# Altium PCB PCB2.PcbDoc (part 1 of 2)
Units mm, origin at the board's own origin, x right, y up, seen from the top; angles counter-clockwise.
Board outline 126 x 36 mm, 2 copper layers (Top Layer, Bottom Layer); 354 components, 48 nets, 750 pads, 362 vias.
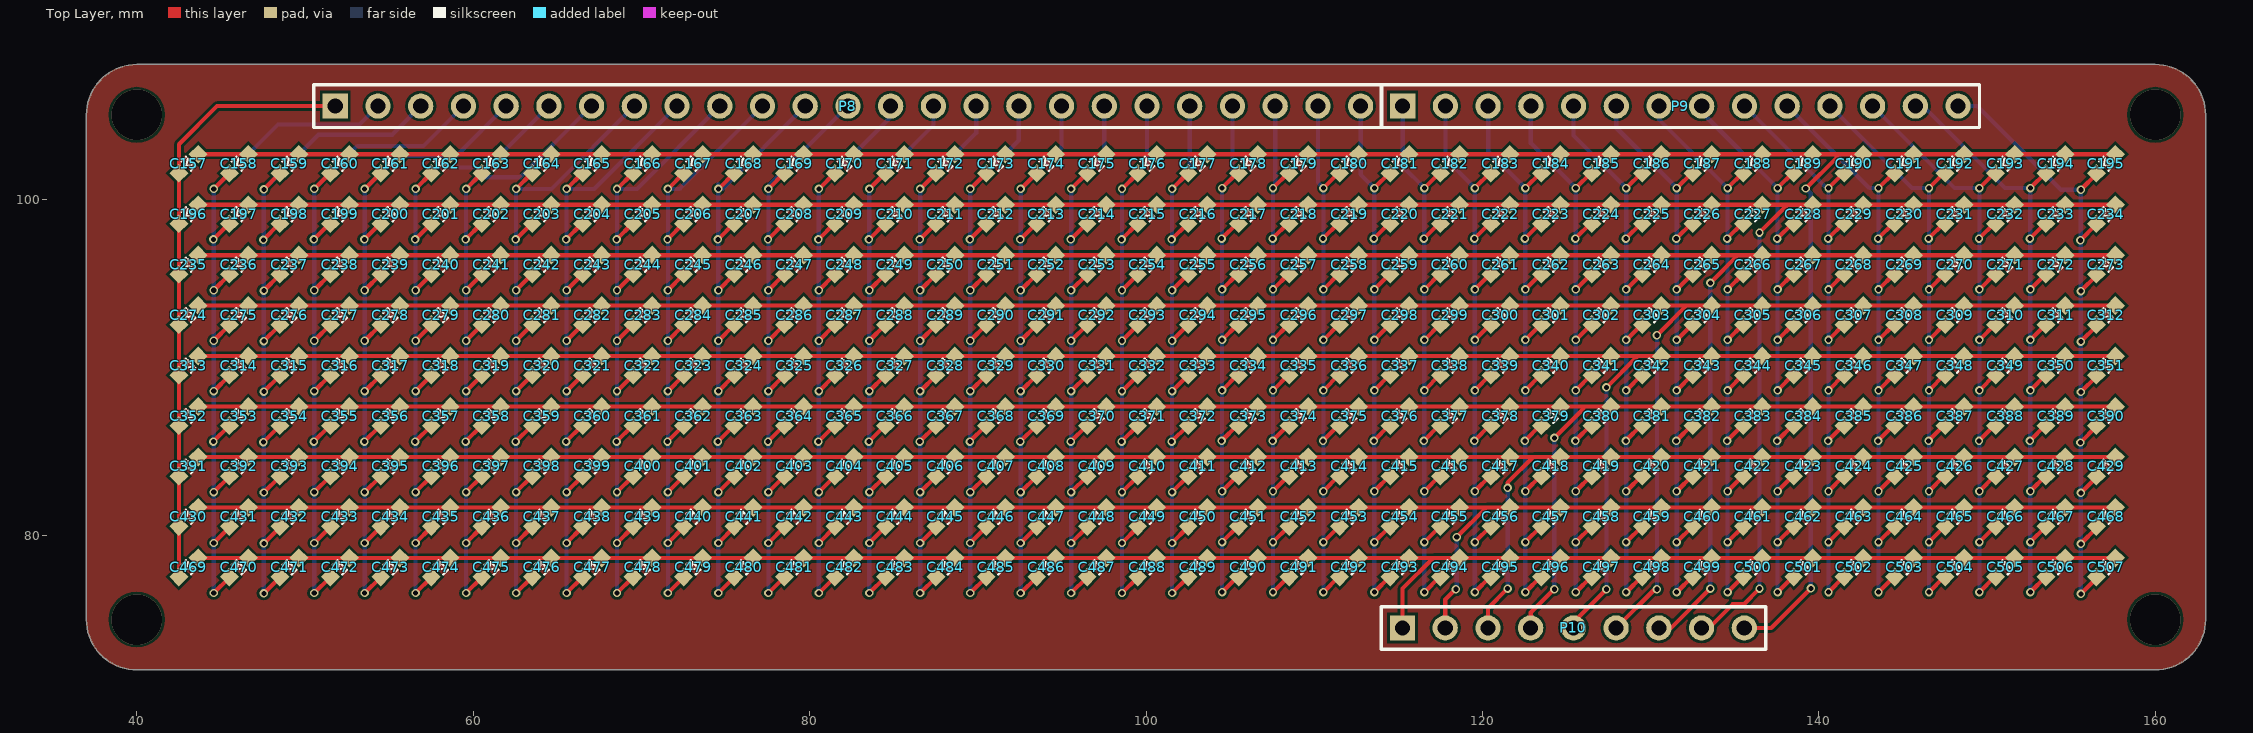
[diagram p0: Top Layer view]
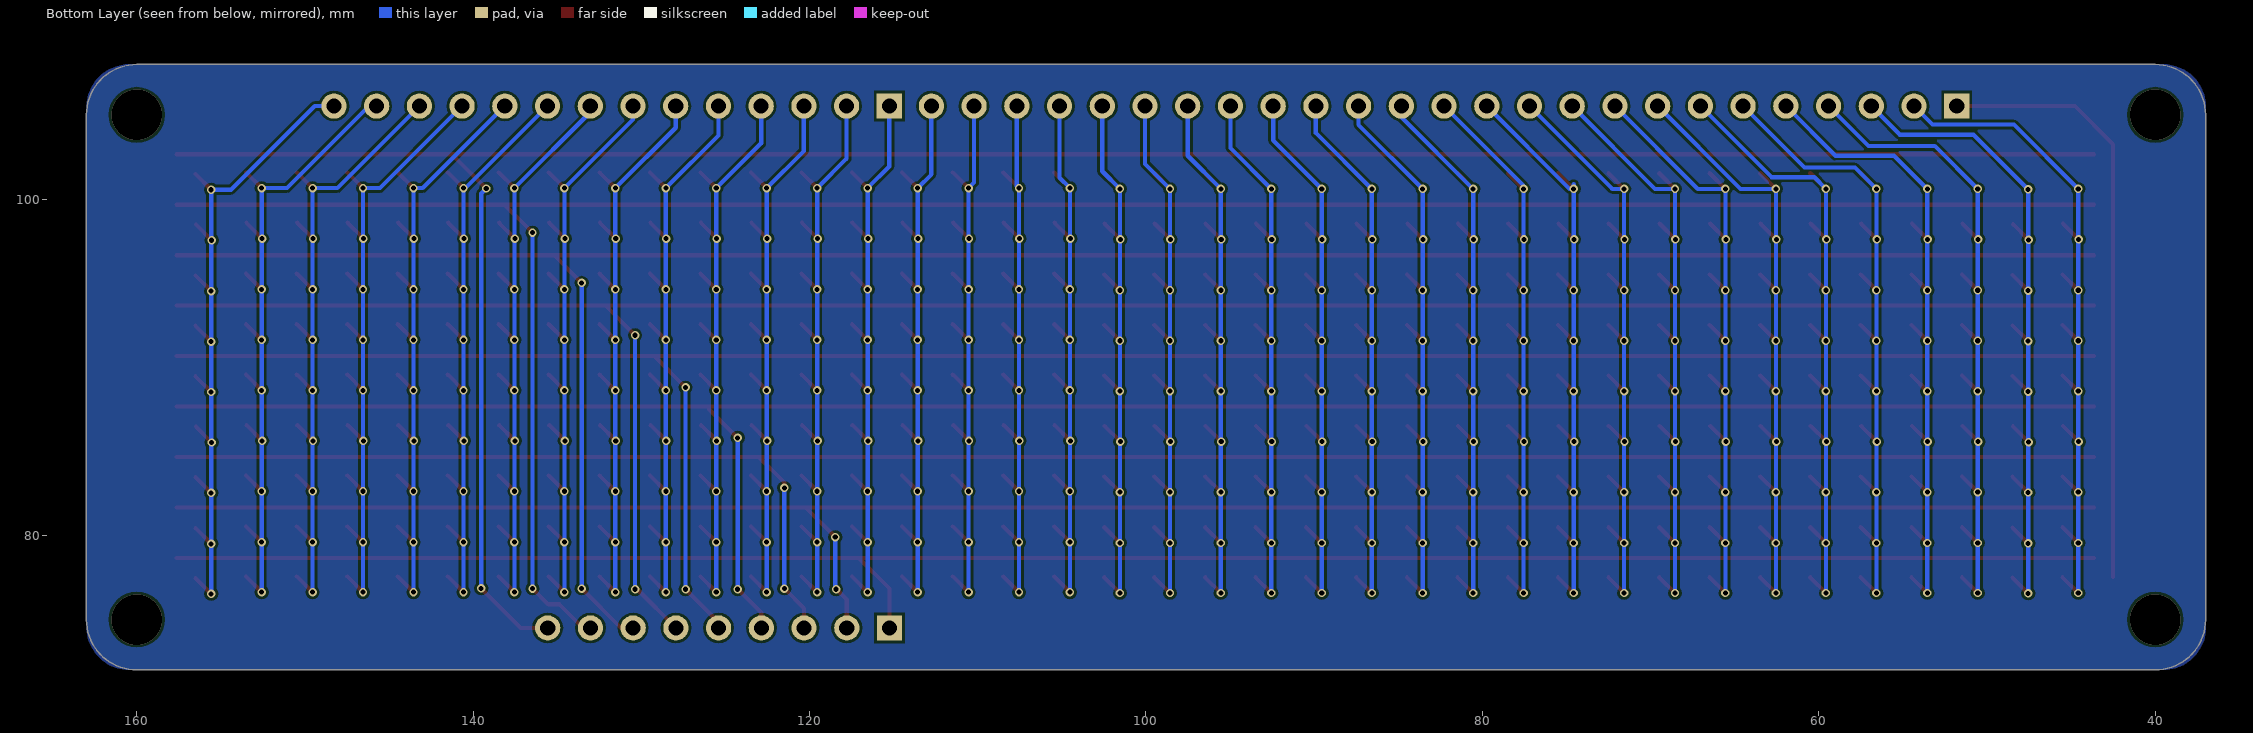
[diagram p1: Bottom Layer view, seen from below]

## Layer stack, top to bottom
Top Solder: solder mask 0.0102, Solder Resist, Dk 3.5
Top Layer: signal copper 0.0356
Dielectric 1: dielectric 0.32, FR-4, Dk 4.8
Bottom Layer: signal copper 0.0356
Bottom Solder: solder mask 0.0102, Solder Resist, Dk 3.5

## Board outline
40,72 cw(c40,75) 37,75 37,105 cw(c40,105) 40,108 160,108 cw(c160,105) 163,105 163,75 cw(c160,75) 160,72

## Design rules (kind name [scope] priority, off if disabled: settings)
Clearance [All] p1: gap=0.152 ignorepadtopadclearanceinfootprint=FALSE except(0.254: Arc-Arc Arc-Track Track-Track)
ComponentClearance [All] p1: gap=0 collisioncheckmode=3 verticalgap=0 showdistances=FALSE
PolygonConnect [All] p1: connectstyle=Relief reliefconductorwidth=0.254 reliefentries=4 polygonreliefangle="90 Angle" airgapwidth=0.254
RoutingCorners [All] p1: cornerstyle=Round minsetback=2.54 maxsetback=2.54
RoutingLayers RoutingLayers_1 [All] p1: top layer_v5=TRUE bottom layer_v5=TRUE
RoutingVias [All] p1: holewidth=0.3 width=0.5 viastyle="Through Hole" minholewidth=0.3 minwidth=0.5 maxholewidth=0.3 maxwidth=0.5
ShortCircuit [All] p1: allowed=TRUE
SolderMaskExpansion [All] p1: expansion=0.102
Width [All] p1: maxlimit=0.254 minlimit=0.254 preferedwidth=0.254
26 further rules are at their usual default settings.

## Components (designator, comment, footprint, x,y, rotation, side; value= is the part's Value field where it differs from the comment)
C157 "LED" "LED 0603(2)" 43.1,102.125 r225 top
C158 "LED" "LED 0603(2)" 46.1,102.125 r225 top
C159 "LED" "LED 0603(2)" 49.1,102.125 r225 top
C160 "LED" "LED 0603(2)" 52.1,102.125 r225 top
C161 "LED" "LED 0603(2)" 55.1,102.125 r225 top
C162 "LED" "LED 0603(2)" 58.1,102.125 r225 top
C163 "LED" "LED 0603(2)" 61.1,102.125 r225 top
C164 "LED" "LED 0603(2)" 64.1,102.125 r225 top
C165 "LED" "LED 0603(2)" 67.1,102.125 r225 top
C166 "LED" "LED 0603(2)" 70.1,102.125 r225 top
C167 "LED" "LED 0603(2)" 73.1,102.125 r225 top
C168 "LED" "LED 0603(2)" 76.1,102.125 r225 top
C169 "LED" "LED 0603(2)" 79.1,102.125 r225 top
C170 "LED" "LED 0603(2)" 82.1,102.125 r225 top
C171 "LED" "LED 0603(2)" 85.1,102.125 r225 top
C172 "LED" "LED 0603(2)" 88.1,102.125 r225 top
C173 "LED" "LED 0603(2)" 91.1,102.125 r225 top
C174 "LED" "LED 0603(2)" 94.1,102.125 r225 top
C175 "LED" "LED 0603(2)" 97.1,102.125 r225 top
C176 "LED" "LED 0603(2)" 100.1,102.125 r225 top
C177 "LED" "LED 0603(2)" 103.1,102.125 r225 top
C178 "LED" "LED 0603(2)" 106.1,102.125 r225 top
C179 "LED" "LED 0603(2)" 109.1,102.125 r225 top
C180 "LED" "LED 0603(2)" 112.1,102.125 r225 top
C181 "LED" "LED 0603(2)" 115.1,102.125 r225 top
C182 "LED" "LED 0603(2)" 118.1,102.125 r225 top
C183 "LED" "LED 0603(2)" 121.1,102.125 r225 top
C184 "LED" "LED 0603(2)" 124.1,102.125 r225 top
C185 "LED" "LED 0603(2)" 127.1,102.125 r225 top
C186 "LED" "LED 0603(2)" 130.1,102.125 r225 top
C187 "LED" "LED 0603(2)" 133.1,102.125 r225 top
C188 "LED" "LED 0603(2)" 136.1,102.125 r225 top
C189 "LED" "LED 0603(2)" 139.1,102.125 r225 top
C190 "LED" "LED 0603(2)" 142.1,102.125 r225 top
C191 "LED" "LED 0603(2)" 145.1,102.125 r225 top
C192 "LED" "LED 0603(2)" 148.1,102.125 r225 top
C193 "LED" "LED 0603(2)" 151.1,102.125 r225 top
C194 "LED" "LED 0603(2)" 154.1,102.125 r225 top
C195 "LED" "LED 0603(2)" 157.1,102.125 r225 top
C196 "LED" "LED 0603(2)" 43.1,99.125 r225 top
C197 "LED" "LED 0603(2)" 46.1,99.125 r225 top
C198 "LED" "LED 0603(2)" 49.1,99.125 r225 top
C199 "LED" "LED 0603(2)" 52.1,99.125 r225 top
C200 "LED" "LED 0603(2)" 55.1,99.125 r225 top
C201 "LED" "LED 0603(2)" 58.1,99.125 r225 top
C202 "LED" "LED 0603(2)" 61.1,99.125 r225 top
C203 "LED" "LED 0603(2)" 64.1,99.125 r225 top
C204 "LED" "LED 0603(2)" 67.1,99.125 r225 top
C205 "LED" "LED 0603(2)" 70.1,99.125 r225 top
C206 "LED" "LED 0603(2)" 73.1,99.125 r225 top
C207 "LED" "LED 0603(2)" 76.1,99.125 r225 top
C208 "LED" "LED 0603(2)" 79.1,99.125 r225 top
C209 "LED" "LED 0603(2)" 82.1,99.125 r225 top
C210 "LED" "LED 0603(2)" 85.1,99.125 r225 top
C211 "LED" "LED 0603(2)" 88.1,99.125 r225 top
C212 "LED" "LED 0603(2)" 91.1,99.125 r225 top
C213 "LED" "LED 0603(2)" 94.1,99.125 r225 top
C214 "LED" "LED 0603(2)" 97.1,99.125 r225 top
C215 "LED" "LED 0603(2)" 100.1,99.125 r225 top
C216 "LED" "LED 0603(2)" 103.1,99.125 r225 top
C217 "LED" "LED 0603(2)" 106.1,99.125 r225 top
C218 "LED" "LED 0603(2)" 109.1,99.125 r225 top
C219 "LED" "LED 0603(2)" 112.1,99.125 r225 top
C220 "LED" "LED 0603(2)" 115.1,99.125 r225 top
C221 "LED" "LED 0603(2)" 118.1,99.125 r225 top
C222 "LED" "LED 0603(2)" 121.1,99.125 r225 top
C223 "LED" "LED 0603(2)" 124.1,99.125 r225 top
C224 "LED" "LED 0603(2)" 127.1,99.125 r225 top
C225 "LED" "LED 0603(2)" 130.1,99.125 r225 top
C226 "LED" "LED 0603(2)" 133.1,99.125 r225 top
C227 "LED" "LED 0603(2)" 136.1,99.125 r225 top
C228 "LED" "LED 0603(2)" 139.1,99.125 r225 top
C229 "LED" "LED 0603(2)" 142.1,99.125 r225 top
C230 "LED" "LED 0603(2)" 145.1,99.125 r225 top
C231 "LED" "LED 0603(2)" 148.1,99.125 r225 top
C232 "LED" "LED 0603(2)" 151.1,99.125 r225 top
C233 "LED" "LED 0603(2)" 154.1,99.125 r225 top
C234 "LED" "LED 0603(2)" 157.1,99.125 r225 top
C235 "LED" "LED 0603(2)" 43.1,96.125 r225 top
C236 "LED" "LED 0603(2)" 46.1,96.125 r225 top
C237 "LED" "LED 0603(2)" 49.1,96.125 r225 top
C238 "LED" "LED 0603(2)" 52.1,96.125 r225 top
C239 "LED" "LED 0603(2)" 55.1,96.125 r225 top
C240 "LED" "LED 0603(2)" 58.1,96.125 r225 top
C241 "LED" "LED 0603(2)" 61.1,96.125 r225 top
C242 "LED" "LED 0603(2)" 64.1,96.125 r225 top
C243 "LED" "LED 0603(2)" 67.1,96.125 r225 top
C244 "LED" "LED 0603(2)" 70.1,96.125 r225 top
C245 "LED" "LED 0603(2)" 73.1,96.125 r225 top
C246 "LED" "LED 0603(2)" 76.1,96.125 r225 top
C247 "LED" "LED 0603(2)" 79.1,96.125 r225 top
C248 "LED" "LED 0603(2)" 82.1,96.125 r225 top
C249 "LED" "LED 0603(2)" 85.1,96.125 r225 top
C250 "LED" "LED 0603(2)" 88.1,96.125 r225 top
C251 "LED" "LED 0603(2)" 91.1,96.125 r225 top
C252 "LED" "LED 0603(2)" 94.1,96.125 r225 top
C253 "LED" "LED 0603(2)" 97.1,96.125 r225 top
C254 "LED" "LED 0603(2)" 100.1,96.125 r225 top
C255 "LED" "LED 0603(2)" 103.1,96.125 r225 top
C256 "LED" "LED 0603(2)" 106.1,96.125 r225 top
C257 "LED" "LED 0603(2)" 109.1,96.125 r225 top
C258 "LED" "LED 0603(2)" 112.1,96.125 r225 top
C259 "LED" "LED 0603(2)" 115.1,96.125 r225 top
C260 "LED" "LED 0603(2)" 118.1,96.125 r225 top
C261 "LED" "LED 0603(2)" 121.1,96.125 r225 top
C262 "LED" "LED 0603(2)" 124.1,96.125 r225 top
C263 "LED" "LED 0603(2)" 127.1,96.125 r225 top
C264 "LED" "LED 0603(2)" 130.1,96.125 r225 top
C265 "LED" "LED 0603(2)" 133.1,96.125 r225 top
C266 "LED" "LED 0603(2)" 136.1,96.125 r225 top
C267 "LED" "LED 0603(2)" 139.1,96.125 r225 top
C268 "LED" "LED 0603(2)" 142.1,96.125 r225 top
C269 "LED" "LED 0603(2)" 145.1,96.125 r225 top
C270 "LED" "LED 0603(2)" 148.1,96.125 r225 top
C271 "LED" "LED 0603(2)" 151.1,96.125 r225 top
C272 "LED" "LED 0603(2)" 154.1,96.125 r225 top
C273 "LED" "LED 0603(2)" 157.1,96.125 r225 top
C274 "LED" "LED 0603(2)" 43.1,93.125 r225 top
C275 "LED" "LED 0603(2)" 46.1,93.125 r225 top
C276 "LED" "LED 0603(2)" 49.1,93.125 r225 top
C277 "LED" "LED 0603(2)" 52.1,93.125 r225 top
C278 "LED" "LED 0603(2)" 55.1,93.125 r225 top
C279 "LED" "LED 0603(2)" 58.1,93.125 r225 top
C280 "LED" "LED 0603(2)" 61.1,93.125 r225 top
C281 "LED" "LED 0603(2)" 64.1,93.125 r225 top
C282 "LED" "LED 0603(2)" 67.1,93.125 r225 top
C283 "LED" "LED 0603(2)" 70.1,93.125 r225 top
C284 "LED" "LED 0603(2)" 73.1,93.125 r225 top
C285 "LED" "LED 0603(2)" 76.1,93.125 r225 top
C286 "LED" "LED 0603(2)" 79.1,93.125 r225 top
C287 "LED" "LED 0603(2)" 82.1,93.125 r225 top
C288 "LED" "LED 0603(2)" 85.1,93.125 r225 top
C289 "LED" "LED 0603(2)" 88.1,93.125 r225 top
C290 "LED" "LED 0603(2)" 91.1,93.125 r225 top
C291 "LED" "LED 0603(2)" 94.1,93.125 r225 top
C292 "LED" "LED 0603(2)" 97.1,93.125 r225 top
C293 "LED" "LED 0603(2)" 100.1,93.125 r225 top
C294 "LED" "LED 0603(2)" 103.1,93.125 r225 top
C295 "LED" "LED 0603(2)" 106.1,93.125 r225 top
C296 "LED" "LED 0603(2)" 109.1,93.125 r225 top
C297 "LED" "LED 0603(2)" 112.1,93.125 r225 top
C298 "LED" "LED 0603(2)" 115.1,93.125 r225 top
C299 "LED" "LED 0603(2)" 118.1,93.125 r225 top
C300 "LED" "LED 0603(2)" 121.1,93.125 r225 top
C301 "LED" "LED 0603(2)" 124.1,93.125 r225 top
C302 "LED" "LED 0603(2)" 127.1,93.125 r225 top
C303 "LED" "LED 0603(2)" 130.1,93.125 r225 top
C304 "LED" "LED 0603(2)" 133.1,93.125 r225 top
C305 "LED" "LED 0603(2)" 136.1,93.125 r225 top
C306 "LED" "LED 0603(2)" 139.1,93.125 r225 top
C307 "LED" "LED 0603(2)" 142.1,93.125 r225 top
C308 "LED" "LED 0603(2)" 145.1,93.125 r225 top
C309 "LED" "LED 0603(2)" 148.1,93.125 r225 top
C310 "LED" "LED 0603(2)" 151.1,93.125 r225 top
C311 "LED" "LED 0603(2)" 154.1,93.125 r225 top
C312 "LED" "LED 0603(2)" 157.1,93.125 r225 top
C313 "LED" "LED 0603(2)" 43.1,90.125 r225 top
C314 "LED" "LED 0603(2)" 46.1,90.125 r225 top
C315 "LED" "LED 0603(2)" 49.1,90.125 r225 top
C316 "LED" "LED 0603(2)" 52.1,90.125 r225 top
C317 "LED" "LED 0603(2)" 55.1,90.125 r225 top
C318 "LED" "LED 0603(2)" 58.1,90.125 r225 top
C319 "LED" "LED 0603(2)" 61.1,90.125 r225 top
C320 "LED" "LED 0603(2)" 64.1,90.125 r225 top
C321 "LED" "LED 0603(2)" 67.1,90.125 r225 top
C322 "LED" "LED 0603(2)" 70.1,90.125 r225 top
C323 "LED" "LED 0603(2)" 73.1,90.125 r225 top
C324 "LED" "LED 0603(2)" 76.1,90.125 r225 top
C325 "LED" "LED 0603(2)" 79.1,90.125 r225 top
C326 "LED" "LED 0603(2)" 82.1,90.125 r225 top
C327 "LED" "LED 0603(2)" 85.1,90.125 r225 top
C328 "LED" "LED 0603(2)" 88.1,90.125 r225 top
C329 "LED" "LED 0603(2)" 91.1,90.125 r225 top
C330 "LED" "LED 0603(2)" 94.1,90.125 r225 top
C331 "LED" "LED 0603(2)" 97.1,90.125 r225 top
C332 "LED" "LED 0603(2)" 100.1,90.125 r225 top
C333 "LED" "LED 0603(2)" 103.1,90.125 r225 top
C334 "LED" "LED 0603(2)" 106.1,90.125 r225 top
C335 "LED" "LED 0603(2)" 109.1,90.125 r225 top
C336 "LED" "LED 0603(2)" 112.1,90.125 r225 top
C337 "LED" "LED 0603(2)" 115.1,90.125 r225 top
C338 "LED" "LED 0603(2)" 118.1,90.125 r225 top
C339 "LED" "LED 0603(2)" 121.1,90.125 r225 top
C340 "LED" "LED 0603(2)" 124.1,90.125 r225 top
C341 "LED" "LED 0603(2)" 127.1,90.125 r225 top
C342 "LED" "LED 0603(2)" 130.1,90.125 r225 top
C343 "LED" "LED 0603(2)" 133.1,90.125 r225 top
C344 "LED" "LED 0603(2)" 136.1,90.125 r225 top
C345 "LED" "LED 0603(2)" 139.1,90.125 r225 top
C346 "LED" "LED 0603(2)" 142.1,90.125 r225 top
C347 "LED" "LED 0603(2)" 145.1,90.125 r225 top
C348 "LED" "LED 0603(2)" 148.1,90.125 r225 top
C349 "LED" "LED 0603(2)" 151.1,90.125 r225 top
C350 "LED" "LED 0603(2)" 154.1,90.125 r225 top
C351 "LED" "LED 0603(2)" 157.1,90.125 r225 top
C352 "LED" "LED 0603(2)" 43.1,87.125 r225 top
C353 "LED" "LED 0603(2)" 46.1,87.125 r225 top
C354 "LED" "LED 0603(2)" 49.1,87.125 r225 top
C355 "LED" "LED 0603(2)" 52.1,87.125 r225 top
C356 "LED" "LED 0603(2)" 55.1,87.125 r225 top
C357 "LED" "LED 0603(2)" 58.1,87.125 r225 top
C358 "LED" "LED 0603(2)" 61.1,87.125 r225 top
C359 "LED" "LED 0603(2)" 64.1,87.125 r225 top
C360 "LED" "LED 0603(2)" 67.1,87.125 r225 top
C361 "LED" "LED 0603(2)" 70.1,87.125 r225 top
C362 "LED" "LED 0603(2)" 73.1,87.125 r225 top
C363 "LED" "LED 0603(2)" 76.1,87.125 r225 top
C364 "LED" "LED 0603(2)" 79.1,87.125 r225 top
C365 "LED" "LED 0603(2)" 82.1,87.125 r225 top
C366 "LED" "LED 0603(2)" 85.1,87.125 r225 top
C367 "LED" "LED 0603(2)" 88.1,87.125 r225 top
C368 "LED" "LED 0603(2)" 91.1,87.125 r225 top
C369 "LED" "LED 0603(2)" 94.1,87.125 r225 top
C370 "LED" "LED 0603(2)" 97.1,87.125 r225 top
C371 "LED" "LED 0603(2)" 100.1,87.125 r225 top
C372 "LED" "LED 0603(2)" 103.1,87.125 r225 top
C373 "LED" "LED 0603(2)" 106.1,87.125 r225 top
C374 "LED" "LED 0603(2)" 109.1,87.125 r225 top
C375 "LED" "LED 0603(2)" 112.1,87.125 r225 top
C376 "LED" "LED 0603(2)" 115.1,87.125 r225 top
C377 "LED" "LED 0603(2)" 118.1,87.125 r225 top
C378 "LED" "LED 0603(2)" 121.1,87.125 r225 top
C379 "LED" "LED 0603(2)" 124.1,87.125 r225 top
C380 "LED" "LED 0603(2)" 127.1,87.125 r225 top
C381 "LED" "LED 0603(2)" 130.1,87.125 r225 top
C382 "LED" "LED 0603(2)" 133.1,87.125 r225 top
C383 "LED" "LED 0603(2)" 136.1,87.125 r225 top
C384 "LED" "LED 0603(2)" 139.1,87.125 r225 top
C385 "LED" "LED 0603(2)" 142.1,87.125 r225 top
C386 "LED" "LED 0603(2)" 145.1,87.125 r225 top
C387 "LED" "LED 0603(2)" 148.1,87.125 r225 top
C388 "LED" "LED 0603(2)" 151.1,87.125 r225 top
C389 "LED" "LED 0603(2)" 154.1,87.125 r225 top
C390 "LED" "LED 0603(2)" 157.1,87.125 r225 top
C391 "LED" "LED 0603(2)" 43.1,84.125 r225 top
C392 "LED" "LED 0603(2)" 46.1,84.125 r225 top
C393 "LED" "LED 0603(2)" 49.1,84.125 r225 top
C394 "LED" "LED 0603(2)" 52.1,84.125 r225 top
C395 "LED" "LED 0603(2)" 55.1,84.125 r225 top
C396 "LED" "LED 0603(2)" 58.1,84.125 r225 top
C397 "LED" "LED 0603(2)" 61.1,84.125 r225 top
C398 "LED" "LED 0603(2)" 64.1,84.125 r225 top
C399 "LED" "LED 0603(2)" 67.1,84.125 r225 top
C400 "LED" "LED 0603(2)" 70.1,84.125 r225 top
C401 "LED" "LED 0603(2)" 73.1,84.125 r225 top
C402 "LED" "LED 0603(2)" 76.1,84.125 r225 top
C403 "LED" "LED 0603(2)" 79.1,84.125 r225 top
C404 "LED" "LED 0603(2)" 82.1,84.125 r225 top
C405 "LED" "LED 0603(2)" 85.1,84.125 r225 top
C406 "LED" "LED 0603(2)" 88.1,84.125 r225 top
C407 "LED" "LED 0603(2)" 91.1,84.125 r225 top
C408 "LED" "LED 0603(2)" 94.1,84.125 r225 top
C409 "LED" "LED 0603(2)" 97.1,84.125 r225 top
C410 "LED" "LED 0603(2)" 100.1,84.125 r225 top
C411 "LED" "LED 0603(2)" 103.1,84.125 r225 top
C412 "LED" "LED 0603(2)" 106.1,84.125 r225 top
C413 "LED" "LED 0603(2)" 109.1,84.125 r225 top
C414 "LED" "LED 0603(2)" 112.1,84.125 r225 top
C415 "LED" "LED 0603(2)" 115.1,84.125 r225 top
C416 "LED" "LED 0603(2)" 118.1,84.125 r225 top
C417 "LED" "LED 0603(2)" 121.1,84.125 r225 top
C418 "LED" "LED 0603(2)" 124.1,84.125 r225 top
C419 "LED" "LED 0603(2)" 127.1,84.125 r225 top
C420 "LED" "LED 0603(2)" 130.1,84.125 r225 top
C421 "LED" "LED 0603(2)" 133.1,84.125 r225 top
C422 "LED" "LED 0603(2)" 136.1,84.125 r225 top
C423 "LED" "LED 0603(2)" 139.1,84.125 r225 top
C424 "LED" "LED 0603(2)" 142.1,84.125 r225 top
C425 "LED" "LED 0603(2)" 145.1,84.125 r225 top
C426 "LED" "LED 0603(2)" 148.1,84.125 r225 top
C427 "LED" "LED 0603(2)" 151.1,84.125 r225 top
C428 "LED" "LED 0603(2)" 154.1,84.125 r225 top
C429 "LED" "LED 0603(2)" 157.1,84.125 r225 top
C430 "LED" "LED 0603(2)" 43.1,81.125 r225 top
C431 "LED" "LED 0603(2)" 46.1,81.125 r225 top
C432 "LED" "LED 0603(2)" 49.1,81.125 r225 top
C433 "LED" "LED 0603(2)" 52.1,81.125 r225 top
C434 "LED" "LED 0603(2)" 55.1,81.125 r225 top
C435 "LED" "LED 0603(2)" 58.1,81.125 r225 top
C436 "LED" "LED 0603(2)" 61.1,81.125 r225 top
C437 "LED" "LED 0603(2)" 64.1,81.125 r225 top
C438 "LED" "LED 0603(2)" 67.1,81.125 r225 top
C439 "LED" "LED 0603(2)" 70.1,81.125 r225 top
C440 "LED" "LED 0603(2)" 73.1,81.125 r225 top
C441 "LED" "LED 0603(2)" 76.1,81.125 r225 top
C442 "LED" "LED 0603(2)" 79.1,81.125 r225 top
C443 "LED" "LED 0603(2)" 82.1,81.125 r225 top
C444 "LED" "LED 0603(2)" 85.1,81.125 r225 top
C445 "LED" "LED 0603(2)" 88.1,81.125 r225 top
C446 "LED" "LED 0603(2)" 91.1,81.125 r225 top
C447 "LED" "LED 0603(2)" 94.1,81.125 r225 top
C448 "LED" "LED 0603(2)" 97.1,81.125 r225 top
C449 "LED" "LED 0603(2)" 100.1,81.125 r225 top
C450 "LED" "LED 0603(2)" 103.1,81.125 r225 top
C451 "LED" "LED 0603(2)" 106.1,81.125 r225 top
C452 "LED" "LED 0603(2)" 109.1,81.125 r225 top
C453 "LED" "LED 0603(2)" 112.1,81.125 r225 top
C454 "LED" "LED 0603(2)" 115.1,81.125 r225 top
C455 "LED" "LED 0603(2)" 118.1,81.125 r225 top
C456 "LED" "LED 0603(2)" 121.1,81.125 r225 top
C457 "LED" "LED 0603(2)" 124.1,81.125 r225 top
C458 "LED" "LED 0603(2)" 127.1,81.125 r225 top
C459 "LED" "LED 0603(2)" 130.1,81.125 r225 top
C460 "LED" "LED 0603(2)" 133.1,81.125 r225 top
C461 "LED" "LED 0603(2)" 136.1,81.125 r225 top
C462 "LED" "LED 0603(2)" 139.1,81.125 r225 top
C463 "LED" "LED 0603(2)" 142.1,81.125 r225 top
C464 "LED" "LED 0603(2)" 145.1,81.125 r225 top
C465 "LED" "LED 0603(2)" 148.1,81.125 r225 top
C466 "LED" "LED 0603(2)" 151.1,81.125 r225 top
C467 "LED" "LED 0603(2)" 154.1,81.125 r225 top
C468 "LED" "LED 0603(2)" 157.1,81.125 r225 top
C469 "LED" "LED 0603(2)" 43.1,78.125 r225 top
C470 "LED" "LED 0603(2)" 46.1,78.125 r225 top
C471 "LED" "LED 0603(2)" 49.1,78.125 r225 top
C472 "LED" "LED 0603(2)" 52.1,78.125 r225 top
C473 "LED" "LED 0603(2)" 55.1,78.125 r225 top
C474 "LED" "LED 0603(2)" 58.1,78.125 r225 top
C475 "LED" "LED 0603(2)" 61.1,78.125 r225 top
C476 "LED" "LED 0603(2)" 64.1,78.125 r225 top
C477 "LED" "LED 0603(2)" 67.1,78.125 r225 top
C478 "LED" "LED 0603(2)" 70.1,78.125 r225 top
C479 "LED" "LED 0603(2)" 73.1,78.125 r225 top
C480 "LED" "LED 0603(2)" 76.1,78.125 r225 top
C481 "LED" "LED 0603(2)" 79.1,78.125 r225 top
C482 "LED" "LED 0603(2)" 82.1,78.125 r225 top
C483 "LED" "LED 0603(2)" 85.1,78.125 r225 top
C484 "LED" "LED 0603(2)" 88.1,78.125 r225 top
C485 "LED" "LED 0603(2)" 91.1,78.125 r225 top
C486 "LED" "LED 0603(2)" 94.1,78.125 r225 top
C487 "LED" "LED 0603(2)" 97.1,78.125 r225 top
C488 "LED" "LED 0603(2)" 100.1,78.125 r225 top
C489 "LED" "LED 0603(2)" 103.1,78.125 r225 top
C490 "LED" "LED 0603(2)" 106.1,78.125 r225 top
C491 "LED" "LED 0603(2)" 109.1,78.125 r225 top
C492 "LED" "LED 0603(2)" 112.1,78.125 r225 top
C493 "LED" "LED 0603(2)" 115.1,78.125 r225 top
C494 "LED" "LED 0603(2)" 118.1,78.125 r225 top
C495 "LED" "LED 0603(2)" 121.1,78.125 r225 top
C496 "LED" "LED 0603(2)" 124.1,78.125 r225 top
C497 "LED" "LED 0603(2)" 127.1,78.125 r225 top
C498 "LED" "LED 0603(2)" 130.1,78.125 r225 top
C499 "LED" "LED 0603(2)" 133.1,78.125 r225 top
C500 "LED" "LED 0603(2)" 136.1,78.125 r225 top
C501 "LED" "LED 0603(2)" 139.1,78.125 r225 top
C502 "LED" "LED 0603(2)" 142.1,78.125 r225 top
C503 "LED" "LED 0603(2)" 145.1,78.125 r225 top
C504 "LED" "LED 0603(2)" 148.1,78.125 r225 top
C505 "LED" "LED 0603(2)" 151.1,78.125 r225 top
C506 "LED" "LED 0603(2)" 154.1,78.125 r225 top
C507 "LED" "LED 0603(2)" 157.1,78.125 r225 top
P8 "Header 25" HDR1X25 51.8,105.525 r0 top locked
P9 "Header 14" HDR1X14 115.26,105.525 r0 top locked
P10 "Header 9" HDR1X9 115.25,74.5 r0 top

## Footprints (in the part's own frame and the unit in brackets; to place one, negate y for a bottom-side part, rotate by r counter-clockwise, add the part's x,y. Pads: shape width x height; smd on the part's side, far side on the other; paste and mask are expansions set on the pad)
HDR1X9 [mm] "Connector; Header; 9 Position"
  rect 1.5x1.5 hole 0.9: 1(0,0)
  round 1.5 hole 0.9: 2(2.54,0) 3(5.08,0) 4(7.62,0) 5(10.16,0) 6(12.7,0) 7(15.24,0) 8(17.78,0) 9(20.32,0)
  silkscreen extent -1.27,-1.27 21.59,1.27
HDR1X14 [mm] "Connector; Header; 14 Position"
  rect 1.5x1.5 hole 0.9: 1(0,0)
  round 1.5 hole 0.9: 2(2.54,0) 3(5.08,0) 4(7.62,0) 5(10.16,0) 6(12.7,0) 7(15.24,0) 8(17.78,0) 9(20.32,0) 10(22.86,0) 11(25.4,0) 12(27.94,0) 13(30.48,0) 14(33.02,0)
  silkscreen extent -1.27,-1.27 34.29,1.27
HDR1X25 [mm] "Connector; Header; 25 Position"
  rect 1.5x1.5 hole 0.9: 1(0,0)
  round 1.5 hole 0.9: 2(2.54,0) 3(5.08,0) 4(7.62,0) 5(10.16,0) 6(12.7,0) 7(15.24,0) 8(17.78,0) 9(20.32,0) 10(22.86,0) 11(25.4,0) 12(27.94,0) 13(30.48,0) 14(33.02,0) 15(35.56,0) 16(38.1,0) 17(40.64,0) 18(43.18,0) 19(45.72,0) 20(48.26,0) 21(50.8,0) 22(53.34,0) 23(55.88,0) 24(58.42,0) 25(60.96,0)
  silkscreen extent -1.27,-1.27 62.23,1.27
"LED 0603(2)" [mm]
  rect 0.8x0.8 smd: 1(-0.762,0) 2(0.838,0)
  silkscreen extent -0.16,-0.4 0.24,0.4

## Part data
P8: "Header, 25-Pin", LatestRevisionDate=17-Jul-2002, LatestRevisionNote="Re-released for DXP Platform.", Publisher="Altium Limited"
P9: "Header, 14-Pin", LatestRevisionDate=17-Jul-2002, LatestRevisionNote="Re-released for DXP Platform.", Publisher="Altium Limited"
P10: "Header, 9-Pin", LatestRevisionDate=17-Jul-2002, LatestRevisionNote="Re-released for DXP Platform.", Publisher="Altium Limited"

## Via types
v1: diameter 0.5, hole 0.3, Top Layer to Bottom Layer, 358 vias
v2: diameter 3, hole 3, Top Layer to Bottom Layer, 4 vias

## Nets (pads, with @x,y where several pads share a name; then routed paths per layer and width w, separated by ;. In a path a pad name is that pad's centre, name@x,y a point inside that pad or via, vN(x,y) a via of type N, cw(c..) or ccw(c..) an arc to the next point about the centre after c; other vN are vias at no path point)
CS1: C157.2 C196.2 C235.2 C274.2 C313.2 C352.2 C391.2 C430.2 C469.2 P8.1 | length 36
  Top Layer w0.254: C469.2@42.507,77.532 C430.2@42.507,80.532 C391.2@42.507,83.532 C352.2@42.507,86.532 C313.2@42.507,89.532 C274.2@42.507,92.532 C235.2@42.507,95.532 C196.2@42.507,98.532 C157.2@42.507,101.532 42.507,103.257 44.775,105.525 P8.1@51.8,105.525
CS2: C158.2 C197.2 C236.2 C275.2 C314.2 C353.2 C392.2 C431.2 C470.2 P8.2 | length 47.6
  Top Layer w0.254: v1(44.55,85.575) C353.2@45.482,86.507 ; v1(44.55,97.6) C197.2@45.482,98.532 ; v1(44.575,76.575) C470.2@45.507,77.507 ; v1(44.575,79.55) C431.2@45.507,80.482 ; v1(44.575,82.575) C392.2@45.507,83.507 ; v1(44.575,88.575) C314.2@45.507,89.507 ; v1(44.575,91.575) C275.2@45.507,92.507 ; v1(44.575,94.575) C236.2@45.507,95.507 ; v1(44.575,100.6) C158.2@45.507,101.532
  Bottom Layer w0.254: v1(44.575,76.575) v1(44.575,79.55) v1(44.575,82.575) v1(44.575,88.575) v1(44.575,91.575) v1(44.575,94.575) v1@44.575,100.55 ; v1(44.575,100.6) 48.4,104.425 53.24,104.425 P8.2@54.34,105.525
CS3: C159.2 C198.2 C237.2 C276.2 C315.2 C354.2 C393.2 C432.2 C471.2 P8.3 | length 47.5
  Top Layer w0.254: v1(47.525,85.55) C354.2@48.457,86.482 ; v1(47.525,97.575) C198.2@48.457,98.507 ; v1(47.55,76.55) C471.2@48.482,77.482 ; v1(47.55,79.525) C432.2@48.482,80.457 ; v1(47.55,82.55) C393.2@48.482,83.482 ; v1(47.55,88.55) C315.2@48.482,89.482 ; v1(47.55,91.55) C276.2@48.482,92.482 ; v1(47.55,94.55) C237.2@48.482,95.482 ; v1(47.55,100.575) C159.2@48.482,101.507
  Bottom Layer w0.254: v1(47.55,76.55) v1(47.55,79.525) v1(47.55,82.55) v1(47.55,88.55) v1(47.55,91.55) v1(47.55,94.55) v1@47.55,100.525 ; v1(47.55,100.575) 50.8,103.825 55.18,103.825 P8.3@56.88,105.525 P8.3@56.65,105.525
CS4: C160.2 C199.2 C238.2 C277.2 C316.2 C355.2 C394.2 C433.2 C472.2 P8.4 | length 46.8
  Top Layer w0.254: v1(50.525,85.575) C355.2@51.457,86.507 ; v1(50.525,97.6) C199.2@51.457,98.532 ; v1(50.55,76.575) C472.2@51.482,77.507 ; v1(50.55,79.55) C433.2@51.482,80.482 ; v1(50.55,82.575) C394.2@51.482,83.507 ; v1(50.55,88.575) C316.2@51.482,89.507 ; v1(50.55,91.575) C277.2@51.482,92.507 ; v1(50.55,94.575) C238.2@51.482,95.507 ; v1(50.55,100.6) C160.2@51.482,101.532
  Bottom Layer w0.254: v1(50.55,76.575) v1(50.55,79.55) v1(50.55,82.575) v1(50.55,88.575) v1(50.55,91.575) v1(50.55,94.575) v1@50.55,100.55 ; v1(50.55,100.6) 53.1,103.15 57.045,103.15 P8.4@59.42,105.525
CS5: C161.2 C200.2 C239.2 C278.2 C317.2 C356.2 C395.2 C434.2 C473.2 P8.5 | length 46.3
  Top Layer w0.254: v1(53.525,85.575) C356.2@54.457,86.507 ; v1(53.525,97.6) C200.2@54.457,98.532 ; v1(53.55,76.575) C473.2@54.482,77.507 ; v1(53.55,79.55) C434.2@54.482,80.482 ; v1(53.55,82.575) C395.2@54.482,83.507 ; v1(53.55,88.575) C317.2@54.482,89.507 ; v1(53.55,91.575) C278.2@54.482,92.507 ; v1(53.55,94.575) C239.2@54.482,95.507 ; v1(53.55,100.6) C161.2@54.482,101.532
  Bottom Layer w0.254: v1(53.55,76.575) v1(53.55,79.55) v1(53.55,82.575) v1(53.55,88.575) v1(53.55,91.575) v1(53.55,94.575) v1@53.55,100.55 ; v1(53.55,100.6) 55.525,102.575 59.01,102.575 P8.5@61.96,105.525
CS6: C162.2 C201.2 C240.2 C279.2 C318.2 C357.2 C396.2 C435.2 C474.2 P8.6 | length 45.8
  Top Layer w0.254: v1(56.55,85.575) C357.2@57.482,86.507 ; v1(56.55,97.6) C201.2@57.482,98.532 ; v1(56.575,76.575) C474.2@57.507,77.507 ; v1(56.575,79.55) C435.2@57.507,80.482 ; v1(56.575,82.575) C396.2@57.507,83.507 ; v1(56.575,88.575) C318.2@57.507,89.507 ; v1(56.575,91.575) C279.2@57.507,92.507 ; v1(56.575,94.575) C240.2@57.507,95.507 ; v1(56.575,100.6) C162.2@57.507,101.532
  Bottom Layer w0.254: v1(56.575,76.575) v1(56.575,79.55) v1(56.575,82.575) v1(56.575,88.575) v1(56.575,91.575) v1(56.575,94.575) v1@56.575,100.55 ; v1(56.575,100.6) 57.85,101.875 60.85,101.875 P8.6@64.5,105.525
CS7: C163.2 C202.2 C241.2 C280.2 C319.2 C358.2 C397.2 C436.2 C475.2 P8.7 | length 45.3
  Top Layer w0.254: v1(59.55,85.575) C358.2@60.482,86.507 ; v1(59.55,97.6) C202.2@60.482,98.532 ; v1(59.575,76.575) C475.2@60.507,77.507 ; v1(59.575,79.55) C436.2@60.507,80.482 ; v1(59.575,82.575) C397.2@60.507,83.507 ; v1(59.575,88.575) C319.2@60.507,89.507 ; v1(59.575,91.575) C280.2@60.507,92.507 ; v1(59.575,94.575) C241.2@60.507,95.507 ; v1(59.575,100.6) C163.2@60.507,101.532
  Bottom Layer w0.254: v1(59.575,76.575) v1(59.575,79.55) v1(59.575,82.575) v1(59.575,88.575) v1(59.575,91.575) v1(59.575,94.575) v1@59.575,100.55 ; v1(59.575,100.6) 60.275,101.3 62.815,101.3 P8.7@67.04,105.525
CS8: C164.2 C203.2 C242.2 C281.2 C320.2 C359.2 C398.2 C437.2 C476.2 P8.8 | length 44.9
  Top Layer w0.254: v1(62.525,85.575) C359.2@63.457,86.507 ; v1(62.525,97.6) C203.2@63.457,98.532 ; v1(62.55,76.575) C476.2@63.482,77.507 ; v1(62.55,79.55) C437.2@63.482,80.482 ; v1(62.55,82.575) C398.2@63.482,83.507 ; v1(62.55,88.575) C320.2@63.482,89.507 ; v1(62.55,91.575) C281.2@63.482,92.507 ; v1(62.55,94.575) C242.2@63.482,95.507 ; v1(62.55,100.6) C164.2@63.482,101.532
  Bottom Layer w0.254: v1(62.55,76.575) v1(62.55,79.55) v1(62.55,82.575) v1(62.55,88.575) v1(62.55,91.575) v1(62.55,94.575) v1@62.55,100.55 ; v1(62.55,100.6) 64.655,100.6 P8.8@69.58,105.525
CS9: C165.2 C204.2 C243.2 C282.2 C321.2 C360.2 C399.2 C438.2 C477.2 P8.9 | length 44.7
  Top Layer w0.254: v1(65.525,85.575) C360.2@66.457,86.507 ; v1(65.525,97.6) C204.2@66.457,98.532 ; v1(65.55,76.575) C477.2@66.482,77.507 ; v1(65.55,79.55) C438.2@66.482,80.482 ; v1(65.55,82.575) C399.2@66.482,83.507 ; v1(65.55,88.575) C321.2@66.482,89.507 ; v1(65.55,91.575) C282.2@66.482,92.507 ; v1(65.55,94.575) C243.2@66.482,95.507 ; v1(65.55,100.6) C165.2@66.482,101.532
  Bottom Layer w0.254: v1(65.55,76.575) v1(65.55,79.55) v1(65.55,82.575) v1(65.55,88.575) v1(65.55,91.575) v1(65.55,94.575) v1@65.55,100.55 ; v1(65.55,100.6) 67.195,100.6 P8.9@72.12,105.525 P8.9@71.85,105.525
CS10: C166.2 C205.2 C244.2 C283.2 C322.2 C361.2 C400.2 C439.2 C478.2 P8.10 | length 44
  Top Layer w0.254: v1(68.525,85.575) C361.2@69.457,86.507 ; v1(68.525,97.6) C205.2@69.457,98.532 ; v1(68.55,76.575) C478.2@69.482,77.507 ; v1(68.55,79.55) C439.2@69.482,80.482 ; v1(68.55,82.575) C400.2@69.482,83.507 ; v1(68.55,88.575) C322.2@69.482,89.507 ; v1(68.55,91.575) C283.2@69.482,92.507 ; v1(68.55,94.575) C244.2@69.482,95.507 ; v1(68.55,100.6) C166.2@69.482,101.532
  Bottom Layer w0.254: v1(68.55,76.575) v1(68.55,79.55) v1(68.55,82.575) v1(68.55,88.575) v1(68.55,91.575) v1(68.55,94.575) v1@68.55,100.55 ; v1(68.55,100.6) 69.735,100.6 P8.10@74.66,105.525
CS11: C167.2 C206.2 C245.2 C284.2 C323.2 C362.2 C401.2 C440.2 C479.2 P8.11 | length 43.5
  Top Layer w0.254: v1(71.55,85.575) C362.2@72.482,86.507 ; v1(71.55,97.6) C206.2@72.482,98.532 ; v1(71.575,76.575) C479.2@72.507,77.507 ; v1(71.575,79.55) C440.2@72.507,80.482 ; v1(71.575,82.575) C401.2@72.507,83.507 ; v1(71.575,88.575) C323.2@72.507,89.507 ; v1(71.575,91.575) C284.2@72.507,92.507 ; v1(71.575,94.575) C245.2@72.507,95.507 ; v1(71.575,100.6) C167.2@72.507,101.532
  Bottom Layer w0.254: v1(71.575,76.575) v1(71.575,79.55) v1(71.575,82.575) v1(71.575,88.575) v1(71.575,91.575) v1(71.575,94.575) v1@71.575,100.55 ; v1(71.575,100.6) 72.275,100.6 P8.11@77.2,105.525
CS12: C168.2 C207.2 C246.2 C285.2 C324.2 C363.2 C402.2 C441.2 C480.2 P8.12 | length 43.3
  Top Layer w0.254: v1(74.55,85.575) C363.2@75.482,86.507 ; v1(74.55,97.6) C207.2@75.482,98.532 ; v1(74.575,76.575) C480.2@75.507,77.507 ; v1(74.575,79.55) C441.2@75.507,80.482 ; v1(74.575,82.575) C402.2@75.507,83.507 ; v1(74.575,88.575) C324.2@75.507,89.507 ; v1(74.575,91.575) C285.2@75.507,92.507 ; v1(74.575,94.575) C246.2@75.507,95.507 ; v1(74.575,100.6) C168.2@75.507,101.532
  Bottom Layer w0.254: v1(74.575,76.575) v1(74.575,79.55) v1(74.575,82.575) v1(74.575,88.575) v1(74.575,91.575) v1(74.575,94.575) v1@74.575,100.55 ; 74.575,100.875 v1(74.575,100.6) 74.815,100.6 P8.12@79.74,105.525
CS13: C169.2 C208.2 C247.2 C286.2 C325.2 C364.2 C403.2 C442.2 C481.2 P8.13 | length 42.7
  Top Layer w0.254: v1(77.525,85.575) C364.2@78.457,86.507 ; v1(77.525,97.6) C208.2@78.457,98.532 ; v1(77.55,76.575) C481.2@78.482,77.507 ; v1(77.55,79.55) C442.2@78.482,80.482 ; v1(77.55,82.575) C403.2@78.482,83.507 ; v1(77.55,88.575) C325.2@78.482,89.507 ; v1(77.55,91.575) C286.2@78.482,92.507 ; v1(77.55,94.575) C247.2@78.482,95.507 ; v1(77.55,100.6) C169.2@78.482,101.532
  Bottom Layer w0.254: v1(77.55,76.575) v1(77.55,79.55) v1(77.55,82.575) v1(77.55,88.575) v1(77.55,91.575) v1(77.55,94.575) v1@77.55,100.55 ; v1(77.55,100.6) 77.55,100.795 P8.13@82.28,105.525
CS14: C170.2 C209.2 C248.2 C287.2 C326.2 C365.2 C404.2 C443.2 C482.2 P8.14 | length 42.5
  Top Layer w0.254: v1(80.525,85.575) C365.2@81.457,86.507 ; v1(80.525,97.6) C209.2@81.457,98.532 ; v1(80.55,76.575) C482.2@81.482,77.507 ; v1(80.55,79.55) C443.2@81.482,80.482 ; v1(80.55,82.575) C404.2@81.482,83.507 ; v1(80.55,88.575) C326.2@81.482,89.507 ; v1(80.55,91.575) C287.2@81.482,92.507 ; v1(80.55,94.575) C248.2@81.482,95.507 ; v1(80.55,100.6) C170.2@81.482,101.532
  Bottom Layer w0.254: v1(80.55,76.575) v1(80.55,79.55) v1(80.55,82.575) v1(80.55,88.575) v1(80.55,91.575) v1(80.55,94.575) v1@80.55,100.55 ; v1(80.55,100.6) 84.82,104.87 P8.14@84.82,105.525
CS15: C171.2 C210.2 C249.2 C288.2 C327.2 C366.2 C405.2 C444.2 C483.2 P8.15 | length 42.3
  Top Layer w0.254: v1(83.525,85.575) C366.2@84.457,86.507 ; v1(83.525,97.6) C210.2@84.457,98.532 ; v1(83.55,76.575) C483.2@84.482,77.507 ; v1(83.55,79.55) C444.2@84.482,80.482 ; v1(83.55,82.575) C405.2@84.482,83.507 ; v1(83.55,88.575) C327.2@84.482,89.507 ; v1(83.55,91.575) C288.2@84.482,92.507 ; v1(83.55,94.575) C249.2@84.482,95.507 ; v1(83.55,100.6) C171.2@84.482,101.532
  Bottom Layer w0.254: v1(83.55,76.575) v1(83.55,79.55) v1(83.55,82.575) v1(83.55,88.575) v1(83.55,91.575) v1(83.55,94.575) v1@83.55,100.55 ; v1(83.55,100.6) 87.36,104.41 P8.15@87.36,105.525
CS16: C172.2 C211.2 C250.2 C289.2 C328.2 C367.2 C406.2 C445.2 C484.2 P8.16 | length 42.1
  Top Layer w0.254: v1(86.55,85.575) C367.2@87.482,86.507 ; v1(86.55,97.6) C211.2@87.482,98.532 ; v1(86.575,76.575) C484.2@87.507,77.507 ; v1(86.575,79.55) C445.2@87.507,80.482 ; v1(86.575,82.575) C406.2@87.507,83.507 ; v1(86.575,88.575) C328.2@87.507,89.507 ; v1(86.575,91.575) C289.2@87.507,92.507 ; v1(86.575,94.575) C250.2@87.507,95.507 ; v1(86.575,100.6) C172.2@87.507,101.532
  Bottom Layer w0.254: v1(86.575,76.575) v1(86.575,79.55) v1(86.575,82.575) v1(86.575,88.575) v1(86.575,91.575) v1(86.575,94.575) v1@86.575,100.55 ; v1(86.575,100.6) 89.9,103.925 P8.16@89.9,105.525
CS17: C173.2 C212.2 C251.2 C290.2 C329.2 C368.2 C407.2 C446.2 C485.2 P8.17 | length 42
  Top Layer w0.254: v1(89.525,85.575) C368.2@90.457,86.507 ; v1(89.525,97.6) C212.2@90.457,98.532 ; v1(89.55,76.575) C485.2@90.482,77.507 ; v1(89.55,79.55) C446.2@90.482,80.482 ; v1(89.55,82.575) C407.2@90.482,83.507 ; v1(89.55,88.575) C329.2@90.482,89.507 ; v1(89.55,91.575) C290.2@90.482,92.507 ; v1(89.55,94.575) C251.2@90.482,95.507 ; v1(89.55,100.6) C173.2@90.482,101.532
  Bottom Layer w0.254: v1(89.55,76.575) v1(89.55,79.55) v1(89.55,82.575) v1(89.55,88.575) v1(89.55,91.575) v1(89.55,94.575) v1@89.55,100.55 ; v1(89.55,100.6) 92.44,103.49 P8.17@92.44,105.525